# Altium PCB 7688_Board_for_Inner_testing.PcbDoc (part 2 of 2)
Units mil, origin at the board's own origin, x right, y up, seen from the top; angles counter-clockwise.
Board outline 3359.02 x 2098.03 mil, 2 copper layers (Top Layer, Bottom Layer), stack 12.8 mil thick; 105 components, 110 nets, 499 pads, 215 vias.
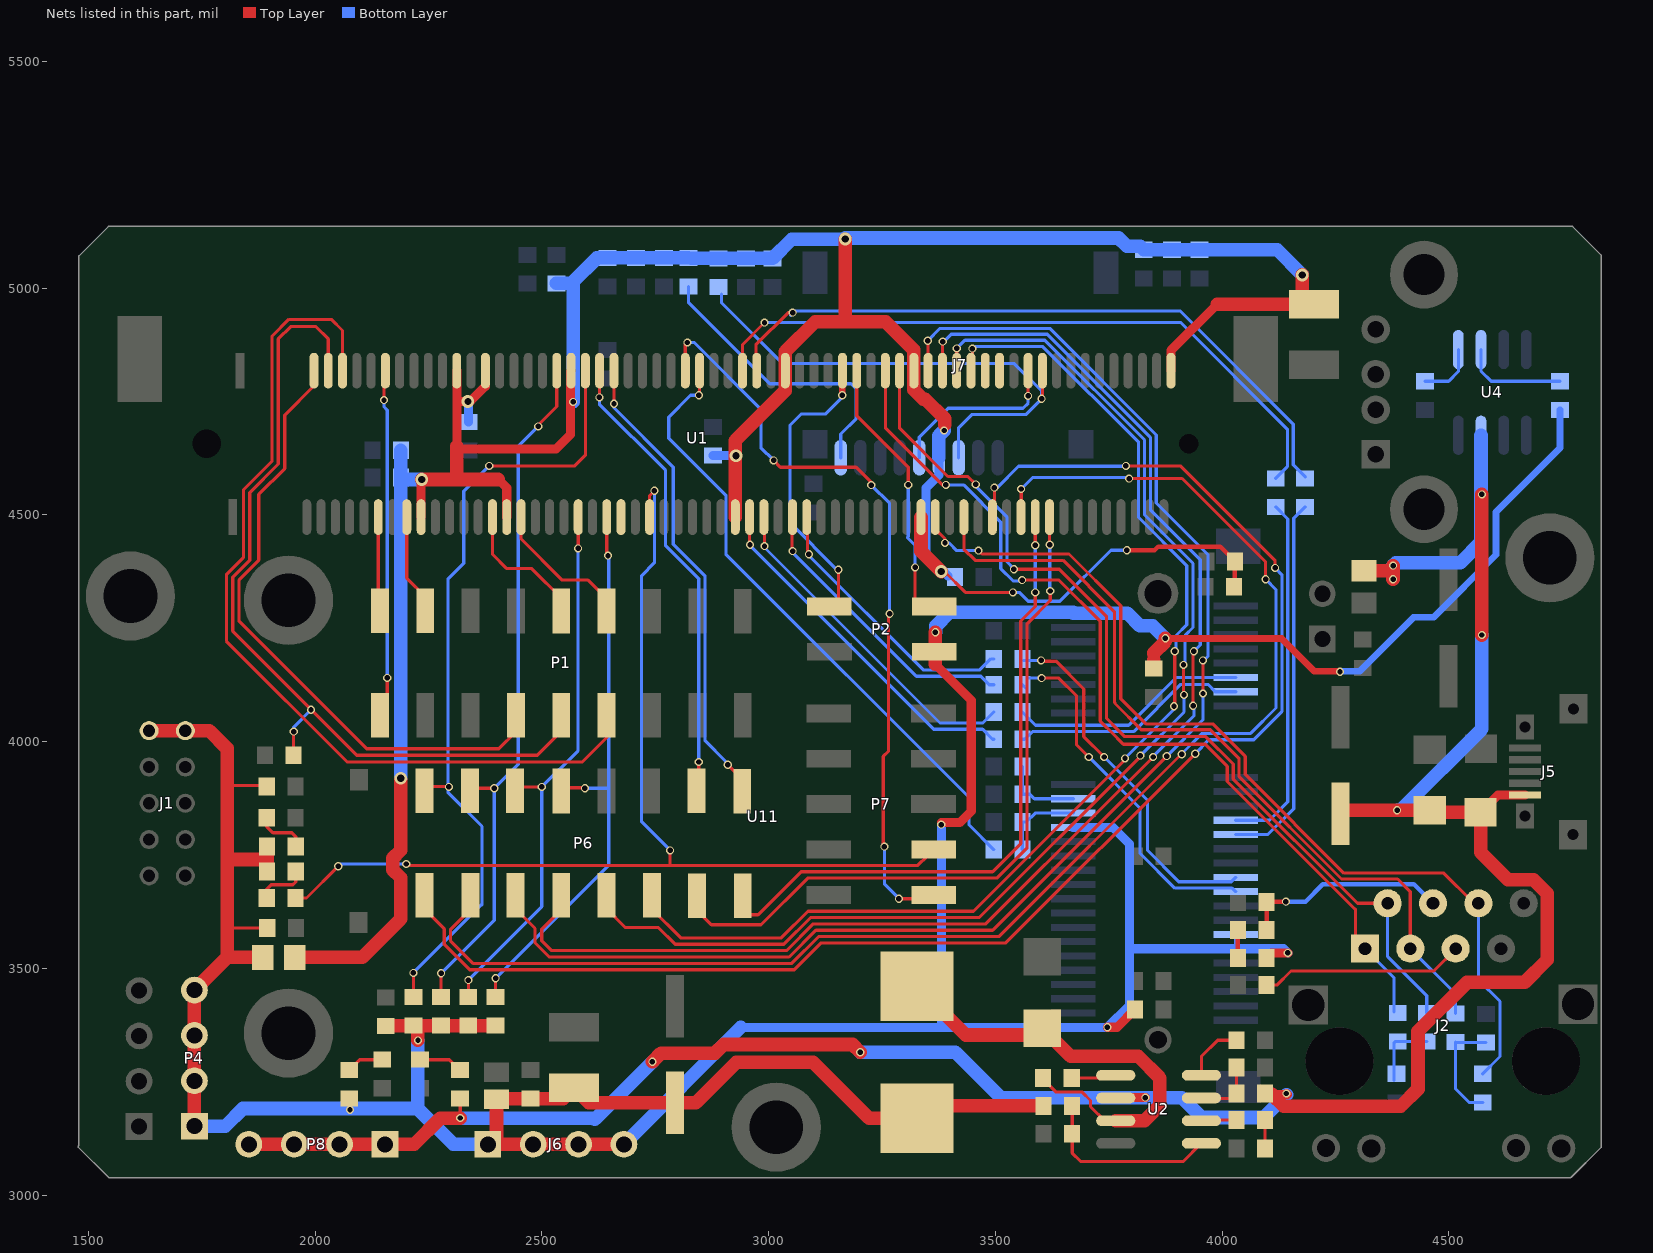
[diagram p2: the nets of this part, all layers, seen from the top]

## Via types
v1: diameter 18, hole 12, Top Layer to Bottom Layer, 203 vias
v2: diameter 28, hole 16, Top Layer to Bottom Layer, 10 vias
v3: diameter 39.37, hole 39.37, Top Layer to Bottom Layer, 2 vias

## Nets (pads, with @x,y where several pads share a name; then routed paths per layer and width w, separated by ;. In a path a pad name is that pad's centre, name@x,y a point inside that pad or via, vN(x,y) a via of type N, cw(c..) or ccw(c..) an arc to the next point about the centre after c; other vN are vias at no path point) (continued)
MCU_PB0: P1.4 U1.4 | length 1363.6
  Top Layer w7: U1.4@1997.54,4817.92 1997.54,4784.54 1933,4720 1933,4602 1876,4545 1876,4400.07 1832.49,4356.56 1832.49,4265.51 2114,3984 2405,3984 P1.4@2443,4022
MCU_PB1: D7.2 P1.5 U1.6 | length 1863.6
  Top Layer w7: D7.2@1952.5,3970 v1@1952.5,4021.5 ; U1.6@2029.04,4817.92 2029.04,4887.96 2002,4915 1946,4915 1919,4888 1919,4612 1856,4549 1856,4399.87 1818.49,4362.36 1818.49,4243.51 2092,3970 2490,3970 P1.5@2543,4023
  Bottom Layer w7: v1(1953,4022) 1953,4032 v1(1991,4070)
MCU_PB2: P1.6 U1.8 | length 2003.8
  Top Layer w7: U1.8@2060.54,4817.92 2060.54,4906.46 2036,4931 1942.2,4931 1905,4893.8 1905,4617.8 1842,4554.8 1842,4405.66 1804.49,4368.16 1804.49,4221.51 2071,3955 2589,3955 2643,4009 P1.6@2643,4058
MCU_PB5: P1.1 U1.14 | length 753.7
  Top Layer w7: v1(2152,4753) 2152,4814.9 U1.14@2155.02,4817.92 ; P1.1@2155.02,4070.02 2159,4074 v1(2159,4140.29)
  Bottom Layer w7: v1(2152,4753) 2152,4738 2159,4731 v1(2159,4140.29)
MCU_UART1_RX: P1.18 U1.13 | length 202.7
  Top Layer w7: P1.18@2139.28,4292.34 U1.13@2139.28,4495.09
MCU_UART1_TX: P1.17 U1.17 | length 192.7
  Top Layer w7: U1.17@2202.27,4495.09 2202.27,4360.55 P1.17@2243.41,4319.41
MCU_UART2_RX: P1.14 U1.29 | length 277.7
  Top Layer w7: U1.29@2391.24,4495.09 2391.24,4412.76 2422,4382 2477,4382 P1.14@2545.5,4313.5
MCU_UART2_TX: P1.13 U1.33 | length 298.7
  Top Layer w7: U1.33@2454.24,4495.09 2454.24,4446.76 2545,4356 2602,4356 P1.13@2648,4310
NC: U1.47
NetC9_1: C9.1 R9.2 R10.2 | length 156.5
  Bottom Layer w7: C9.1@4379.25,3252.53 4379.25,3336 4381.79,3338.54 R10.2@4387.25,3338.54 R9.2@4451.25,3338.54
NetC11_1: C11.1 J2.4 L1.2 | length 462.7
  Top Layer w10: L1.2@4098.06,3584.5 C11.1@4098.06,3646.5 v1@4140.39,3646.5
  Bottom Layer w10: v1@4140,3644 v1@4140.88,3644 ; v1(4140.88,3647) 4184,3647 4222.37,3685.37 4423.11,3685.37 J2.4@4465.11,3643.37
NetC13_2: C13.2 J2.5 | length 451.1
  Top Layer w7: C13.2@4098.06,3463 4121,3463 4152,3494 4467,3494 4515.11,3542.11 J2.5@4515.11,3543.37
NetC15_2: C15.2 R15.1 R16.1 | length 242.1
  Bottom Layer w7: R16.1@4514.75,3337.47 4514.75,3234.25 4544.53,3204.47 R15.1@4574.75,3204.47 ; R16.1@4515.69,3336.54 C15.2@4582.25,3336.54
NetC17_1: C17.1 U2.1 | length 91.2
  Top Layer w7: C17.1@3668.53,3258.25 U2.1@3759.76,3258.25
NetC17_2: C17.2 D5.2 L3.1 U2.3 | length 999.3
  Top Layer w7: C17.2@3605.54,3258.25 3605.54,3255.46 3634.07,3226.93 3691.53,3226.93 3710,3208.46 3710,3195 3741,3164 U2.3@3765.51,3164
  Top Layer w30: L3.1@3327,3460.67 3434.67,3353 D5.2@3606.92,3353 ; D5.2@3611,3360.92 3665.92,3306 3815,3306 3863,3258 3863,3198 3829,3164 U2.3@3765.51,3164
NetC20_2: C20.2 U2.8 | length 133.3
  Top Layer w7: U2.8@3954.49,3264 3954.49,3305.49 3990.25,3341.25 C20.2@4031.54,3341.25
NetC25_1: C25.1 R30.2 | length 62.5
  Top Layer w7: R30.2@4094.53,3102.75 C25.1@4094.53,3165.25
NetC25_2: C25.2 U2.6 | length 75.8
  Top Layer w7: U2.6@3955.74,3165.25 C25.2@4031.54,3165.25
NetD1_1: D1.1 R1.2 | length 113.4
  Top Layer w7: D1.1@1893.5,3655 1893.5,3674.5 1903.19,3684.19 1951.19,3684.19 1957.46,3690.46 R1.2@1957.46,3713.75
NetD2_1: D2.1 R3.2 | length 114.3
  Top Layer w7: D2.1@1893.5,3832 1893.5,3812.5 1907,3799 1949,3799 1957.46,3790.54 R3.2@1957.46,3768.75
NetD3_1: D3.1 R25.2 | length 97.8
  Top Layer w7: D3.1@2231,3298.5 2296.29,3298.5 R25.2@2319.25,3275.54
NetD4_1: D4.1 R26.2 | length 82.3
  Top Layer w7: R26.2@2075.25,3275.54 2098.21,3298.5 D4.1@2148,3298.5
NetL1_1: L1.1 R13.1 | length 61.5
  Top Layer w10: R13.1@4035.07,3523 L1.1@4035.07,3584.5
NetR19_1: R19.1 R20.1 U11.22 | length 181.3
  Bottom Layer w7: R19.1@3559.53,3761.75 R20.1@3559.53,3822.75 3568.44,3822.75 3588,3842.31 U11.22@3671.73,3842.31
NetR21_1: R21.1 R22.1 U11.20 | length 177.3
  Bottom Layer w7: R21.1@3559.53,3944.75 R22.1@3559.53,3883.75 3576.25,3883.75 3586.2,3873.8 U11.20@3671.73,3873.8
NetR27_1: R27.1 R55.2 U2.7 | length 139.4
  Top Layer w7: U2.7@3954.49,3214 3955.49,3213 4020.79,3213 R27.1@4031.54,3223.75 R55.2@4031.54,3281.25
NetR28_2: R28.2 R29.2 U2.5 | length 413.5
  Top Layer w7: R28.2@3669.46,3196.75 R29.2@3669.46,3135.25 3669.46,3092.54 3688,3074 3914.49,3074 U2.5@3954.49,3114
NetR58_2: R58.2 U11.13 | length 526.3
  Bottom Layer w7: R58.2@3559.46,4005.25 3565.25,4005.25 3582,4022 ; 3582.92,4022 3805,4022 3909,4126 3969,4126 3984.98,4110.02 U11.13@4030,4110.02
NetR59_2: R59.2 U11.11 | length 526.4
  Bottom Layer w7: R59.2@3559.46,4065.25 3588.72,4036 3794,4036 3899.52,4141.52 U11.11@4030,4141.52
NetR60_2: R60.2 U11.25 | length 827.6
  Bottom Layer w7: U11.25@4030,3795.06 4101.06,3795.06 4158,3852 4158,4492.28 R60.2@4183.25,4517.54
NetR61_2: R61.2 U11.23 | length 793.4
  Bottom Layer w7: U11.23@4030,3826.56 4104.56,3826.56 4145,3867 4145,4490.79 R61.2@4118.25,4517.54
NetR62_2: R62.2 U11.33 | length 782.4
  Top Layer w7: v1@3605,4140 3640,4140 3679,4101 3679,3993 v1(3706,3966)
  Bottom Layer w7: R62.2@3559.46,4125.25 R62.2@3568.72,4116 ; R62.2@3574.21,4140 3592.72,4140 v1(3602,4140) v1@3605,4140 ; v1@3708,3964 3819.1,3852.9 3819.1,3753.9 3896,3677 4022.08,3677 U11.33@4030,3669.08
NetR63_2: R63.2 U11.31 | length 799.6
  Top Layer w7: v1(3601,4179) 3603,4177 3634,4177 3695,4116 3695,4011 v1(3740,3966)
  Bottom Layer w7: R63.2@3562.72,4179 v1(3601,4179) ; v1(3740,3966) 3835.9,3870.1 3835.9,3759.7 3904.6,3691 4020.43,3691 U11.31@4030,3700.57
PCIE_CKN: R59.1 U1.67 | length 741.6
  Top Layer w7: v1(2991,4431) U1.67@2991,4493.76
  Bottom Layer w7: v1(2991,4431) 2991,4428 3378,4041 3472.22,4041 R59.1@3496.47,4065.25
PCIE_CKP: R58.1 U1.65 | length 777.3
  Top Layer w7: v1@2958,4433.42 2958,4494.91 U1.65@2958.17,4495.09
  Bottom Layer w7: v1@2958.21,4433.21 3364.42,4027 3472,4027 3493.75,4005.25 R58.1@3496.47,4005.25
  other v1: 2959,4434
PCIE_RXN: R61.1 U1.64 | length 1495.7
  Top Layer w7: U1.64@2942.43,4817.92 2942.43,4875.43 v1(2991,4924)
  Bottom Layer w7: v1(2991,4924) 3909,4924 4144,4689 4144,4606.28 R61.1@4118.25,4580.53
PCIE_RXP: R60.1 U1.66 | length 1510.8
  Top Layer w7: U1.66@2973.92,4817.92 2972,4819.84 2972,4875 3043,4946 v1(3053,4946)
  Bottom Layer w7: v1@3049,4940 3058.69,4949.69 3907.31,4949.69 4157,4700 4157,4610 R60.1@4183.25,4583.75
PCIE_TXN: R63.1 U1.73 | length 608.2
  Top Layer w7: U1.73@3086,4495.93 3086,4416 v1(3089,4413)
  Bottom Layer w7: v1@3087.5,4411.5 3341,4158 3466,4158 3490.25,4182.25 R63.1@3496.47,4182.25
PCIE_TXP: R62.1 U1.71 | length 642.9
  Top Layer w7: v1@3052,4418 U1.71@3052,4494.43
  Bottom Layer w7: v1@3051.5,4418.5 3326,4144 3468,4144 3486.75,4125.25 R62.1@3496.47,4125.25
  other v1: 3053,4420
PERSTN: R19.2 U1.58 | length 1389.9
  Top Layer w7: v1@2847.94,4765 U1.58@2847.94,4817.92
  Bottom Layer w7: v1(2846.5,4763.5) 2827.92,4763.5 2780,4715.58 2780,4669 2906,4543 2906,4413 3442,3877 3442,3816.28 R19.2@3496.54,3761.75
RXIN0: J2.2 R9.1 U1.86 | length 2126.1
  Top Layer w7: U1.86@3288.88,4817.92 3288.88,4691 3395.38,4584.5 3439.5,4584.5 v1(3457,4567) ; v1(3541,4380) 3641,4380 3745.32,4275.68 3745.32,4051 3768.82,4027.5 3768.88,4027.5 3785.38,4011 3964.23,4011 4024.62,3950.62 4024.62,3917.3 4298.54,3643.37 J2.2@4365.11,3643.37
  Bottom Layer w7: v1(3457,4567) 3457,4563.42 3526,4494.42 3526,4396 3541,4381 v1(3541,4380) ; J2.2@4365.11,3643.37 4365.11,3525.89 4451.25,3439.75 R9.1@4451.25,3401.53
RXIN1: P6.1 U1.99 | length 3360.7
  Top Layer w7: P6.1@2241,3661 2241,3631 2285,3587 2285,3553 2341,3497 3057,3497 3116,3556 3523,3556 v1@3940.5,3973.5 ; U1.99@3496,4497.48 3498,4499.48 v1(3498,4560) ; v1(3787.8,4608) 3908,4608 4117,4399 v1(4117,4383)
  Bottom Layer w7: v1(3498,4560) 3504,4560 3551,4607 v1@3788.8,4607 ; v1@3940.5,3973.5 3971,4004 4070,4004 4132,4066 4132,4368 v1(4117,4383)
  other v1: 3941,3973
RXIN2: P6.6 U1.96 | length 2563.4
  Top Layer w7: P6.6@2743,3661 2743,3630 2806,3567 3028,3567 3087,3626 3452,3626 3786,3960 v1(3786,3963) ; U1.96@3449.5,4821.06 v1(3449.5,4866.5) ; v1(3894,4078) 3895.5,4079.5 v1(3895.5,4199)
  Bottom Layer w7: v1@3451,4865 3457,4871 3604.85,4871 3815.92,4659.92 3815.92,4494.08 3922,4388 3922,4257.38 3898.5,4233.88 3898.5,4202 v1(3895.5,4199) ; v1(3786,3963) 3894,4071 v1(3894,4078)
RXIN4: J7.3 R52.2 U1.106 | length 1193.8
  Top Layer w7: v1@3603.84,4757.84 U1.106@3603.84,4782.84 ; U1.106@3603.84,4782.84 3605,4784 3605,4816.76 U1.106@3603.84,4817.92 U1.106@3603.84,4782.84
  Bottom Layer w7: R52.2@2896.25,4986.54 2896.25,4967.75 3030,4834 3541,4834 3602,4773 v1(3602,4756) 3567,4721 3448,4721 3419,4692 J7.3@3419,4626
RXIP0: J2.1 R10.1 U1.84 | length 2069.6
  Top Layer w7: U1.84@3257.39,4817.92 3258,4818.54 3258,4690.77 3382.77,4566 v1(3391,4566) ; v1@3562.9,4356.32 3640,4356.32 3731.32,4265 3731.32,4045.2 3763.02,4013.5 3763.08,4013.5 3774.5,4002.08 3774.5,4002.02 3782.52,3994 3962.85,3994 4011.62,3945.23 4011.62,3911.91 4293.16,3630.37 4294.25,3630.37 4294.25,3564.23 J2.1@4315.11,3543.37
  Bottom Layer w7: v1(3391,4566) 3430,4566 3512,4484 3512,4381.42 3539.42,4354 v1@3557,4354 ; J2.1@4315.11,3543.37 4315.11,3542.89 4379.25,3478.75 R10.1@4379.25,3403.53
  other v1: 3559,4356
RXIP1: P6.2 U1.103 | length 3210.3
  Top Layer w7: P6.2@2343,3661 2343,3630 2299,3586 2299,3560 2348,3511 3051.2,3511 3110.2,3570 3508,3570 v1@3910.5,3972.5 ; U1.103@3557,4495.49 v1(3557,4557) ; v1(3795,4580) 3912,4580 4096,4396 v1(4096,4358)
  Bottom Layer w7: v1(3557,4557) 3582,4582 v1@3794,4582 ; v1@3910.5,3972.5 3956,4018 4063,4018 4119,4074 4119,4335 v1(4096,4358)
  other v1: 3911,3972
RXIP2: P6.5 U1.94 | length 2756.1
  Top Layer w7: P6.5@2643,3661 2643,3631 2684,3590 2757,3590 2794,3553 3033.8,3553 3092.8,3612 3465,3612 v1@3816,3963 ; U1.94@3414.87,4817.92 v1(3415,4867) ; v1(3915,4169) 3915,4104 v1(3916,4103)
  Bottom Layer w7: v1(3415,4867) 3433,4885 3609.23,4885 3828.92,4665.31 3828.92,4500.08 3936,4393 3936,4251.58 3918.5,4234.08 3918.5,4172.5 v1(3915,4169) ; v1(3820,3969) 3916,4065 v1(3916,4103)
RXIP4: J7.5 U1.104 | length 388
  Top Layer w7: v1(3572.35,4762.35) U1.104@3572.35,4817.92
  Bottom Layer w7: J7.5@3332.39,4626 3332.39,4671.39 3396,4735 3561,4735 3572.35,4746.35 v1(3572.35,4762.35)
SPI_CLK: P6.13 R67.1 U1.45 | length 1275.2
  Top Layer w7: R67.1@2398,3436.78 v1(2398,3478) ; P6.13@2529.71,3877.71 P6.13@2543,3891 ; P6.13@2550,3898 2594,3898 v1(2595,3897) ; v1@2643.21,4412.79 U1.45@2643.21,4495.09
  Bottom Layer w7: v1(2398,3478) 2647.5,3727.5 2647.5,4408.5 v1(2646,4410) ; v1(2595,3897) 2646.5,3897
SPI_CS1: P6.16 R64.1 U1.42 | length 1772.3
  Top Layer w7: R64.1@2216.8,3436.58 v1(2216.8,3490) ; P6.16@2241,3891.61 P6.16@2241,3901 ; P6.16@2245,3901 v1@2296,3901 ; v1(2384,4608) 2573,4608 2595.97,4630.97 U1.42@2595.97,4817.92
  Bottom Layer w7: v1(2216.8,3490) 2366.8,3640 2368,3640 2368,3813 2293,3888 2293,4358 2328,4393 2328,4552 v1(2384,4608)
  other v1: 2295,3900
SPI_MISO: P6.15 R65.1 U1.38 | length 1540.6
  Top Layer w7: R65.1@2277.8,3436.58 v1(2277.8,3489) ; P6.15@2342,3891.82 2347.18,3897 v1(2395,3897) ; v1@2490.5,4696.5 2532.98,4738.98 U1.38@2532.98,4817.92
  Bottom Layer w7: v1@2278.3,3489.5 2395,3606.2 v1(2395,3897) 2448,3950 2448,4651 v1(2492,4695)
SPI_MOSI: P6.14 R66.1 U1.41 | length 1220.8
  Top Layer w7: R66.1@2338,3436.78 v1(2338,3474) ; P6.14@2441,3891.61 2444.61,3891.61 2453,3900 v1(2500,3900) ; v1@2580.22,4426.22 U1.41@2580.22,4495.09
  Bottom Layer w7: v1(2338,3474) 2500,3636 v1(2500,3900) 2580,3980 v1(2580,4426)
TF_INT: J7.9 R68.2 | length 649.6
  Bottom Layer w7: R68.2@2823.25,5003.54 2823.25,4968.75 3003,4789 3182,4789 3193,4778 3193,4712 3159.16,4678.16 J7.9@3159.16,4626
TXON0: J2.6 R15.2 U1.91 | length 2117.2
  Top Layer w7: U1.91@3367.62,4495.09 3367.62,4468.29 3389,4446.91 v1(3389,4438) ; v1(3462.88,4421) 3470.38,4413.5 3662.5,4413.5 3776.5,4299.5 3776.5,4094.5 3832,4039 3979.38,4039 4051,3967.38 4051,3927.68 4268.68,3710 4489,3710 J2.6@4550,3649
  Bottom Layer w7: v1(3389,4438) 3397.91,4438 3414.91,4421 v1(3462.88,4421) ; J2.6@4573.8,3643.37 J2.6@4565.11,3643.37 4565.11,3474.89 4612.81,3427.19 4612.81,3305.53 R15.2@4574.75,3267.46
TXON1: P6.3 U1.90 | length 3183.2
  Top Layer w7: P6.3@2442,3661 2442,3631 2485,3588 2485,3556.2 2516.2,3525 3045.4,3525 3104.4,3584 3494,3584 v1(3878,3968) ; U1.90@3351.87,4817.92 v1@3351.87,4883.13 ; v1(3958,4106) v1@3958,4178.88
  Bottom Layer w7: v1(3351,4884) 3378,4911 3620,4911 3855,4676 3855,4526 3969,4412 3969,4188.12 v1@3958.88,4178 ; v1(3878,3968) 3958,4048 v1(3958,4106)
  other v1: 3957.88,4179
TXON2: P6.7 U1.107 | length 1592.5
  Top Layer w7: P6.7@2842,3660 2842,3628 2874,3596 2983.25,3596 3086.25,3699 3503,3699 3570,3766 3570,4260 3621,4311 v1(3621,4332) ; v1@3619.59,4434.41 U1.107@3619.59,4495.09
  Bottom Layer w7: v1@3620,4333 v1(3620,4434)
TXON3: U1.100
TXOP0: J2.3 R16.2 U1.95 | length 1818.9
  Top Layer w7: U1.95@3430.61,4495.09 3430.61,4424.39 3455.5,4399.5 3649.5,4399.5 3762.5,4286.5 3762.5,4087.3 3763.9,4085.9 3763.9,4083.9 3821.8,4026 3974,4026 4037.62,3962.38 4037.62,3922.68 4263.3,3697 4387,3697 4415.11,3668.89 J2.3@4415.11,3543.37
  Bottom Layer w7: J2.3@4415.11,3543.37 4514.75,3443.73 R16.2@4514.75,3400.46
TXOP1: P6.4 U1.92 | length 3066.1
  Top Layer w7: P6.4@2543,3661 2543,3629 2500,3586 2500,3561 2522,3539 3039.6,3539 3098.6,3598 3479,3598 3744,3863 v1(3848,3966) ; U1.92@3383.37,4817.92 v1@3383.37,4881.37 ; v1(3936,4079) v1@3936,4199
  Bottom Layer w7: v1(3384,4882) 3386.42,4882 3402.42,4898 3614.62,4898 3841.92,4670.69 3841.92,4511.08 3952,4401 3952,4213 v1(3938,4199) ; v1@3847.5,3966.5 3938,4057 3938,4077 v1@3937,4078
TXOP2: P6.8 U1.105 | length 1402.3
  Top Layer w7: P6.8@2952,3618 2977,3618 3072,3713 3494,3713 3556,3775 3556,4265.8 3588,4297.8 v1(3588,4329) ; v1@3588.09,4433.09 U1.105@3588.09,4495.09
  Bottom Layer w7: v1(3588,4329) v1(3588,4433)
TXOP3: U1.98
UART0_RX: P2.2 U1.80 | length 623.9
  Top Layer w7: U1.80@3194.39,4817.92 3194.39,4718.61 3308,4605 v1(3308,4566) ; v1(3323,4384) 3323,4298 P2.2@3365,4298 ; P2.2@3359,4288 P2.2@3364,4293
  Bottom Layer w7: v1(3308,4566) 3308,4452 3306,4450 3323,4433 v1(3323,4384)
UART0_TX: P2.3 U1.78 | length 655.6
  Top Layer w7: P2.3@3134.18,4294 P2.3@3156,4315.82 ; 3154,4317.82 v1(3154,4379)
  Top Layer w15: v1(3162.5,4763.5) U1.78@3162.5,4817.52
  Bottom Layer w7: v1(3154,4379) 3150.71,4379 3047.5,4482.21 3047.5,4698 3071.5,4722 3125,4722 3162.5,4759.5 v1(3162.5,4763.5)
UART1_RX: P6.10 U1.44 | length 1013.6
  Top Layer w7: v1(2627,4759) U1.44@2627,4817.46 ; P6.10@2841,3891.61 2846,3896.61 v1(2846,3955)
  Bottom Layer w7: v1(2627,4759) 2627,4744 2773,4598 2773,4432 2846,4359 v1@2846,3960
UART1_TX: P6.9 U1.46 | length 1009.4
  Top Layer w7: v1@2658.96,4744.87 U1.46@2658.96,4817.92 ; v1(2910,3949) P6.9@2942,3917
  Bottom Layer w7: v1(2659.17,4744.87) 2659.17,4735.83 2790,4605 2790,4434.8 2860,4364.8 2860,4002 v1@2906,3956
USB_OVERCUR: R43.1 U4.2 | length 231
  Bottom Layer w7: U4.2@4571,4864.49 4571,4817 4593.47,4794.53 R43.1@4745.25,4794.53
USB_PWREN: R41.1 U4.1 | length 131.1
  Bottom Layer w7: R41.1@4447.25,4794.53 4499.53,4794.53 4521,4816 U4.1@4521,4864.49
V3.3: C21.1 C22.2 C23.2 C24.1 C46.2 C47.2 J1.1 J1.2 J6.1 J6.2 J6.3 J6.4 L3.2 P2.1 P4.1 P4.2 P4.3 P4.4 R1.1 R2.2 R3.1 R5.2 R6.2 R13.2 R26.1 R28.1 R31.1 R43.2 R64.2 R65.2 R66.2 R67.2 U11.2 U11.24 U11.39 U11.41 U11.52 | length 9382.9
  Top Layer w7: 1806,3588 1807.25,3589.25 R6.2@1894.54,3589.25 ; 1806,3903 R31.1@1891.22,3903
  Top Layer w15: 3849.5,4180 3849.5,4194 3883,4227.5 4131.5,4227.5 4204,4155 v1@4260,4155
  Top Layer w20: 3367.8,4170.2 3447,4091 3447,3846.79 3421.53,3821.31 v1@3380.88,3821.31 ; v1(3747,3370) 3768.51,3370 C46.2@3807.76,3409.25 ; R13.2@4109.06,3534 v1(4145,3534)
  Top Layer w30: J1.1@1634,4024 J1.2@1714,4024 1767,4024 1806,3985 1806,3903 1806,3739 ; P4.1@1734,3152 P4.2@1734,3252 P4.3@1734,3352 P4.4@1734,3452 1806,3524 ; R2.2@1884.57,3524 1806,3524 ; R31.1@1891.22,3903 R31.1@1893.47,3900.75 ; R1.1@1894.47,3713.75 1894.47,3740 ; R3.1@1894.47,3768.75 1894.47,3740 ; R5.2@2155.75,3372.54 2156.75,3373.54 R64.2@2216.75,3373.54 R65.2@2277.75,3373.54 R66.2@2337.75,3373.54 R67.2@2397.75,3373.54 ; v1@2226,3341 R64.2@2226,3366.28 ; J6.1@2381,3112 J6.2@2481,3112 J6.3@2581,3112 J6.4@2681,3112 ; J6.1@2400,3117 C23.2@2400,3211.56 ; C23.2@2400.98,3212.54 C22.2@2474.75,3212.54 2547.04,3212.54 C21.1@2571,3236.5 2603.8,3203.7 C24.1@2794,3203.7 2839.7,3203.7 2929,3293 3098,3293 3221.67,3169.33 L3.2@3327,3169.33 3354.42,3196.75 R28.1@3606.47,3196.75 ; 3367.8,4170.2 v1(3367.8,4241) ; C47.2@3849.5,4161.71 3849.5,4180 ; 3849.5,4194 3849.5,4195.43 3875,4220.93 v1(3875,4228) ; 1806,3524 1806,3588 1806,3739 ; 1806,3739 1807,3740 1894.47,3740
  Bottom Layer w7: U11.41@4030,3543.09 U11.39@4030,3574.59
  Bottom Layer w15: v1@4260,4155 4302.78,4155 4421.78,4274 4466,4274 4604,4412 4604,4506 4745.25,4647.25 R43.2@4745.25,4731.54
  Bottom Layer w20: 2938.87,3369.87 3381,3369.87 ; v1@3381,3811 3381,3369.87 ; U11.24@3671.73,3810.81 3759.19,3810.81 3796,3774 3796,3541 ; v1(4145,3534) 4135.91,3543.09 U11.41@4030,3543.09 3798.09,3543.09 3796,3541 ; 3381,3369.87 U11.52@3671.73,3369.87 v1(3747,3370) 3796,3419 3796,3541
  Bottom Layer w30: P4.1@1734,3152 1802,3152 1841,3191 2226,3191 ; v1@2226,3341 2226,3191 ; J6.1@2381,3112 2305,3112 2226,3191 ; J6.4@2681,3112 2938.87,3369.87 ; v1@3369,4241 3369,4255 3398.94,4284.94 3671.73,4284.94 U11.2@3671.73,4283.25 3790.75,4283.25 3819,4255 3847,4255 v1@3874,4228
  other v1: 2077,3188 2227,3341 3380.88,3817 4260,4154
V3.3V: C1.1 C2.2 C3.2 C4.2 C5.2 C6.2 C7.2 C8.2 C50.1 C51.1 J7.4 R2.1 R4.2 R50.1 R51.1 R52.1 R53.1 R54.1 R56.2 R57.2 R68.1 U1.19 U1.24 U1.28 U1.31 U1.40 U1.63 U1.70 U1.88 U1.89 U1.124 | length 7404.5
  Top Layer w7: v2(3381,4375) 3388,4375 3434,4329 v1(3538.88,4329) v1@3541,4329
  Top Layer w10: v1(3790,4422) 3851,4422 3859,4430 3995.78,4430 R53.1@4027.53,4398.25 ; R54.1@4027.53,4342.25 R53.1@4027.53,4398.25 ; R53.1@4028.53,4397.25 R53.1@4027.53,4398.25
  Top Layer w20: U1.19@2233.76,4495.09 2233.76,4578 v2(2235,4578) ; 2312,4578 2312,4586 ; U1.24@2312.5,4817.92 2312.5,4651 2318.5,4645 2531,4645 2563,4677 2563,4816.45 U1.40@2564.47,4817.92 ; 2314.5,4750 v2(2337,4750) 2342.15,4750 2375.5,4783.34 U1.28@2375.5,4817.92 ; 2404,4578 2422.74,4559.26 U1.31@2422.74,4495.09 ; U1.124@3887.31,4817.92 3887.31,4862.31 3989,4964
  Top Layer w30: R2.1@1955.43,3524 2104,3524 2189,3609 2189,3699.57 2171,3717.57 2171,3742.43 2189,3760.43 v2@2189,3916 ; v2(2235,4578) 2312,4578 2404,4578 ; 2312,4586 2312.5,4586.5 2312.5,4651 ; U1.63@2926.68,4495.09 2926.68,4663.68 3036.91,4773.91 U1.70@3036.91,4817.92 3036.91,4859.91 3103,4926 3258,4926 3320.38,4863.62 U1.88@3320.38,4817.92 3320.38,4775.62 3341,4755 3345.43,4755 3388.82,4711.6 3388.82,4699 ; 3169,4932 v2(3169,5108) ; U1.89@3336.13,4495.09 3336.13,4419.87 v2(3381,4375) ; 3989,4964 C1.1@4203,4964 ; v2(4177,5029) 4177,4990.5 C1.1@4203,4964.5
  Bottom Layer w7: v1(3538.88,4329) 3553,4329 3572.56,4309.44 3642.44,4309.44 3755,4422 v1(3790,4422)
  Bottom Layer w20: C2.2@2338.75,4704.46 v2@2338.75,4748.25 ; C7.2@2877.25,4630.54 v2@2927.46,4630.54 ; J7.4@3375.69,4626 3375.69,4587.69 3347,4559 3347,4414 C6.2@3396,4365
  Bottom Layer w30: v2(2189,3919) C4.2@2189,4641.79 ; C3.2@2196.72,4578 v2(2235,4578) ; C5.2@2532.11,5010.23 2561.03,5010.23 ; v1(2569,4749) 2569,5014 2621.46,5066.46 R56.2@2644.75,5066.46 R4.2@2707.75,5066.46 R57.2@2769.75,5066.46 R68.1@2823.19,5066.46 ; R68.1@2829.75,5065.46 C8.2@3008.75,5065.46 3051,5107.72 3051,5108 v2(3169,5108) ; v2@3169,5110.5 3771.76,5110.5 3790.26,5092 3819.78,5092 C50.1@3827.25,5084.53 C51.1@3889.25,5084.53 R50.1@3950.25,5084.53 4121.47,5084.53 v2(4177,5029) ; J7.4@3375.69,4626 3375.69,4674.69 v1(3387,4686)
  other v2: 2928,4630
VCC5V: C18.1 C19.1 D6.2 J5.1 P8.1 P8.2 P8.3 P8.4 R25.1 R27.2 R39.1 U2.2 U4.7 | length 5590.5
  Top Layer w7: v1(2320,3170) R25.1@2320,3211.8
  Top Layer w20: U2.2@3765.51,3214 3766.51,3215 v1(3831,3215) ; R27.2@4110,3222 4144,3222 v1(4142,3224) ; D6.2@4570,3844 4608,3882 J5.1@4668,3882
  Top Layer w30: P8.4@1854,3112 P8.3@1954,3112 P8.2@2054,3112 P8.1@2154,3112 2218.71,3112 2275.71,3169 v1@2320,3169 ; v1(2744,3294) 2763,3313 2882,3313 2901,3332 3185,3332 v1(3202,3315) ; R27.2@4110,3222 4136,3196 4394,3196 4432,3234 4432,3361 4540,3469 4667,3469 4717.11,3519.11 4717.11,3664.91 4686.65,3695.37 4630.49,3695.37 4570,3755.86 D6.2@4570,3844 C18.1@4462.5,3844 ; C19.1@4268.8,3848.5 v1(4386,3848.5) C18.1@4458,3848.5 ; R39.1@4313,4376.43 4374,4376.43 ; v1(4377,4358) v1(4377,4388) ; v1(4573,4235) v1(4573,4545)
  Bottom Layer w20: v1@4142,3221 v1(4142,3224)
  Bottom Layer w30: v1@2320,3169 2617,3169 ; 2617,3167 v1(2744,3294) ; v1(3202,3315) 3412,3315 3512,3215 v1(3831,3215) 3911,3215 3955,3171 4092,3171 v1@4142,3221 ; v1(4377,4388) 4383,4394 4525,4394 4571,4440 U4.7@4571,4675.51 ; v1(4386,3848.5) 4393.5,3848.5 4573,4028 v1(4573,4235)
WLED: D1.2 P7.7 U1.51 | length 2363.8
  Top Layer w7: D1.2@1956.5,3655 1981,3655 v1(2051,3725) v1@2051,3728.5 ; v1(2201,3730) 2204,3727 2782,3727 ; U1.51@2737.7,4495.09 2737.7,4542.5 v1(2748.2,4553) ; v1(2783,3760) 2783,3728 2782,3727 ; P7.7@3349.5,3747.5 3329,3727 2782,3727
  Bottom Layer w7: v1(2051,3725) 2056,3730 v1(2201,3730) ; v1(2748.2,4553) 2748.2,4394.2 2720,4366 2720,3823 v1(2783,3760)
WPS: P7.6 U1.56 | length 1669.7
  Top Layer w7: U1.56@2816.44,4817.92 v1@2816.44,4875.44 ; v1(3011,4620) 3026,4605 3193,4605 v1@3230.9,4567.1 ; v1@3253,3769 3253,3967.3 3264.5,3978.8 3264.5,4279.5 v1(3267,4282) ; v1(3287.5,3653.5) 3355.5,3653.5 P7.6@3364,3662
  Bottom Layer w7: v1(2821,4880) 2836,4880 2983,4733 2983,4648 v1(3011,4620) ; v1(3226.6,4565.6) 3267,4525.2 v1(3267,4282) ; v1(3255.5,3768.5) 3255.5,3686.5 v1@3285,3657
pads on no net: J1.4 J1.8 J2.0 J2.7 J2.9 J2.10 J2.11 J2.12 J5.2 J5.3 J5.4 J7.10 J7.11 P1.10 R32.1 R32.2 U1.0@1613.69,4843.51 U1.0@1761.32,4656.5 U1.0@3926.68,4656.5 U1.1 U1.2 U1.15 U1.16 U1.18 U1.21 U1.22 U1.36 U1.43 U1.61 U1.68 U1.75 U1.93 U1.97 U1.112 U1.113 U1.117 U1.119 U1.121 U1.122 U1.123 U4.4 U4.5 U11.0 U11.1 U11.3 U11.5 U11.7 U11.8 U11.10 U11.12 U11.14 U11.16 U11.17 U11.19 U11.30 U11.32 U11.36 U11.38 U11.45 U11.46 U11.47 U11.49 U11.51 U11.53 U11.54 U11.55 U11.56
copper on no net:
  other v3: 3224.91,5049.39 3539.08,5049.39

## Polygon pours and split planes (outlines as drawn)
DGND on Bottom Layer "Bottom Layer-No Net" (solid, remove dead copper, pour order 4): 4834,3107 4834,5071 4771,5134 1546,5134 1481,5069 1481,3106 1546,3041 4768,3041 4834,3107
DGND on Top Layer "Bottom Layer-No Net" (solid, remove dead copper, pour order 6): 4834,3107 4834,5071 4771,5134 1546,5134 1481,5069 1481,3108 1480,3107 1546,3041 4768,3041 4834,3107

## Keep-outs
Keep-Out Layer:
  lines w5: 1480,3107 1546,3041 4768,3041 4834,3107 4834,5071 4771,5134 1546,5134 1481,5069 1481,3106

## Silkscreen, mask and mechanical layers (free items; w line width, h text height)
Top Overlay:
  circle w10: c3005,4305 r15.52
  circle w10: c3007,3913 r15.52
  lines w6: 1855,3162 1855,3217 1939,3217 1939,3162 ; 3422,4117 3815,4117 3815,4070 3827,4058 3851,4058 3869,4040 3869,3844 3423,3844 3423,4117 3423,4170 3502,4170 3502,4118 ; 3507,4306.02 3507,4347 3437,4347 3437,4302 ; 3627,4191 3627,4302 ; 3643,4117 3643,3925 3665.93,3902.07 3665.93,3847 ; 3437,4302 3437,4189 3824,4189 3824,4282 3804,4302 3437,4302
  lines w8: 4057,4054 4056,4055 3955,4055 ; 3955,4055 3959,4059 3959,4131 4057,4131 4057,3995 3897,3995 3897,4051 3893,4055 3955,4055
  lines w10: 2116,3177 2439,3177 2439,3330 2439,3428.01 2483,3472.01 ; 2671,3470 2485.01,3470 2483,3472.01 ; 2675,3470 2675,3568 2586,3568 2579,3561 2483,3561 2483,3472.01 ; 2733,3107 2875,3107 2875,3056 ; 2973,3245 2973,3429 3109,3429 3109,3250 3109,3209 ; 3109,3247 3109,3257 ; 3112,3239 3288,3063 3611,3063 3648,3100 ; 3571,3100 3648,3100 ; 3651,3643 3651,3823 3776,3823 ; 3699,3100 3648,3100 ; 3721,3506 3804,3506 3804,3650 ; 3805,3554 3887,3554 3954,3487 3954,3411 3985,3380 ; 3933,4371 4055.5,4371 ; 3933,4422 3933,4308 4060,4308 4060,4425 3936,4425 ; 3985,3292 3985,3380 ; 4000,3682 4000,3426 4107,3426 ; 4000,3683 4134,3683 ; 4012,3781 4011,3782 4011,3946 4104,3946 ; 4053,3064 4132,3064 4132,3130 ; 4065,4420 4105,4420 4129,4444 ; 4088,4272 4153,4272 ; 4089,4401 4089,4147 4155,4147 4155,4403 4091,4403 ; 4117,4143 4158,4102 4285,4102 4305,4122 ; 4125,3380 3985,3380 ; 4134,3593 4134,3683 ; 4134,3799 4134,3683 ; 4134,4502.99 4266.01,4502.99 ; 4281,4266 4347,4266 ; 4129,4444 4262,4444 4266,4448 4266,4563 4129,4563 4129,4552 4129,4444 ; 4274,4125 4274,4411 4276,4413 4287,4413 4352,4413 4352,4125 4274,4125
  text "P2" at 3447,4308 h30
  text "URT0_R" at 3640,4260 h30
  text "URT0_T" at 3448,4258 h30
  text "GND" at 3470,4201 h30
  text "V3.3" at 3659,4199 h30
  text "P15" at 3974,4141 h30
  text "P7" at 3438,4128 h30
  text "GND" at 3968,4073 h30
  text "GPIO0" at 3670,4066 h30
  text "I2S_SDI" at 3437,4060 h30
  text "I2S_SDO" at 3669,4008 h30
  text "LINK" at 3440,4004 h30
  text "+1.5V" at 3909,4000 h30
  text "I2S_CLK" at 3435,3955 h30
  text "LINK4" at 3672,3955 h30
  text "WLED" at 3673,3912 h30
  text "I2S_WS" at 3434,3907 h30
  text "WPS" at 3683,3861 h30
  text "I2S_CLK0" at 3435,3858 h30
  text "5V" at 1874,3171 h30
  text "GND" at 1574,3062 h30
  text "3.3V" at 1681,3062 h30
  text "3.3V" at 2744,3059 h30
Bottom Overlay:
  circle w10: c3014,4298 r15.52
  circle w10: c3002,3688 r15.52
  lines w8: 2109,4073 2985,4073 ; 2203,3523 2986,3523 ; 2107,3814 2985,3814 2985,4441 2107,4441 2107,3814 ; 2203,3356 2203,3772 2985,3772 2985,3358 2987,3356 2203,3356
  lines w10: 3433,4503 3654,4503 3777,4626 4210,4626 4297,4539 4297,4373 ; 4271,4368 4260,4357 4260,4300 4270,4290 4297,4290 4306,4281 4306,3776 4321,3761 4448,3761 4462,3775 4462,4289 4449,4302 4366,4302 4366,4356 4354,4368 4275,4368
  text "MCU_I2C1_SDA" at 2458,4431 h30 r90
  text "MCU_UART1-TX" at 2254,4430 h30 r90
  text "MCU_PB1" at 2558,4430 h30 r90
  text "MCU_UART2-TX" at 2657,4430 h30 r90
  text "MCU_UART1-RX" at 2159,4429 h30 r90
  text "MCU_I2C_SCL" at 2359.09,4429.09 h30 r90
  text "MCU_NRST" at 2753,4429 h30 r90
  text "MCU_BOOT" at 2859,4429 h30 r90
  text "NC" at 2958,4315 h30 r90
  text "MCU_UART2-RX" at 2560,4195 h30 r90
  text "P1" at 3001,4055 h30 r270
  text "MCU_PA12" at 2249,4050 h30 r90
  text "MCU_PB0" at 2444,4048 h30 r90
  text "MCU_PA11" at 2360,4047 h30 r90
  text "MCU_PA8" at 2759,4045 h30 r90
  text "MCU_PB2" at 2656,4043 h30 r90
  text "MCU_PA0" at 2953,4043 h30 r90
  text "MCU_PB5" at 2157,4036 h30 r90
  text "MCU_PA1" at 2855,4034 h30 r90
  text "I2C_SDA" at 2644,3752 h30 r90
  text "UART1_TX" at 2954,3752 h30 r90
  text "SPI_MOSI" at 2454,3751 h30 r90
  text "SPI_CLK" at 2550,3751 h30 r90
  text "I2C_CLK" at 2754,3751 h30 r90
  text "SPI_MISO" at 2357,3750 h30 r90
  text "UART1_RX" at 2855,3750 h30 r90
  text "SPI_CS1" at 2253,3744 h30 r90
  text "P6" at 2992,3558 h30 r270
  text "TXON2" at 2856,3504 h30 r90
  text "TXOP2" at 2956,3503 h30 r90
  text "RXIN1" at 2252,3500 h30 r90
  text "RXIP1" at 2352,3500 h30 r90
  text "TXON1" at 2462,3500 h30 r90
  text "RXIP2" at 2652,3500 h30 r90
  text "RXIN2" at 2762,3500 h30 r90
  text "TXOP1" at 2554,3497 h30 r90

## Text inside footprints (layer, text, board x,y; h text height)
U11: Bottom Overlay "1" at 4013.52,4342.3 h60 r270